# Altium PCB TAUV-PHOD-Board.PcbDoc
Units mil, origin at the board's own origin, x right, y up, seen from the top; angles counter-clockwise.
Board outline 3480 x 2460 mil, 2 copper layers (Top Layer, Bottom Layer); 102 components, 57 nets, 317 pads, 60 vias.
Unrouted connection lines stored in the file: 1.
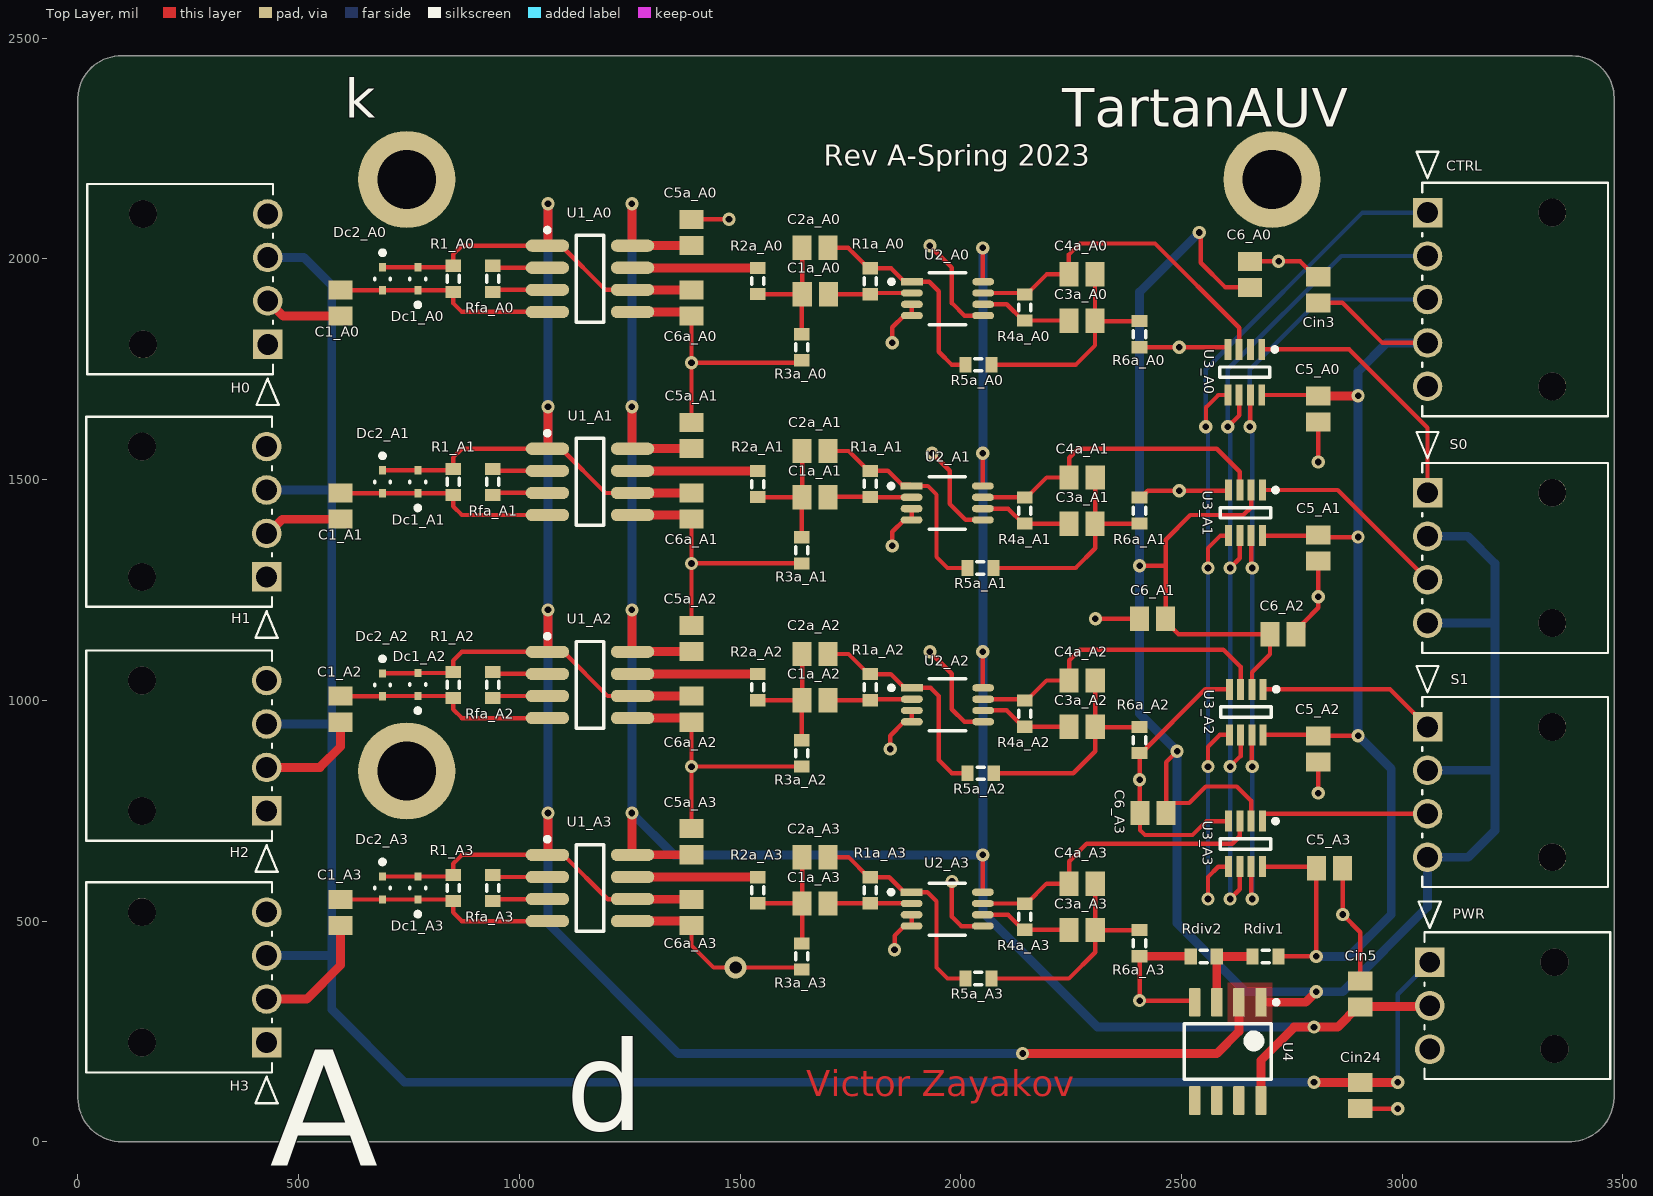
[diagram p0: Top Layer view]
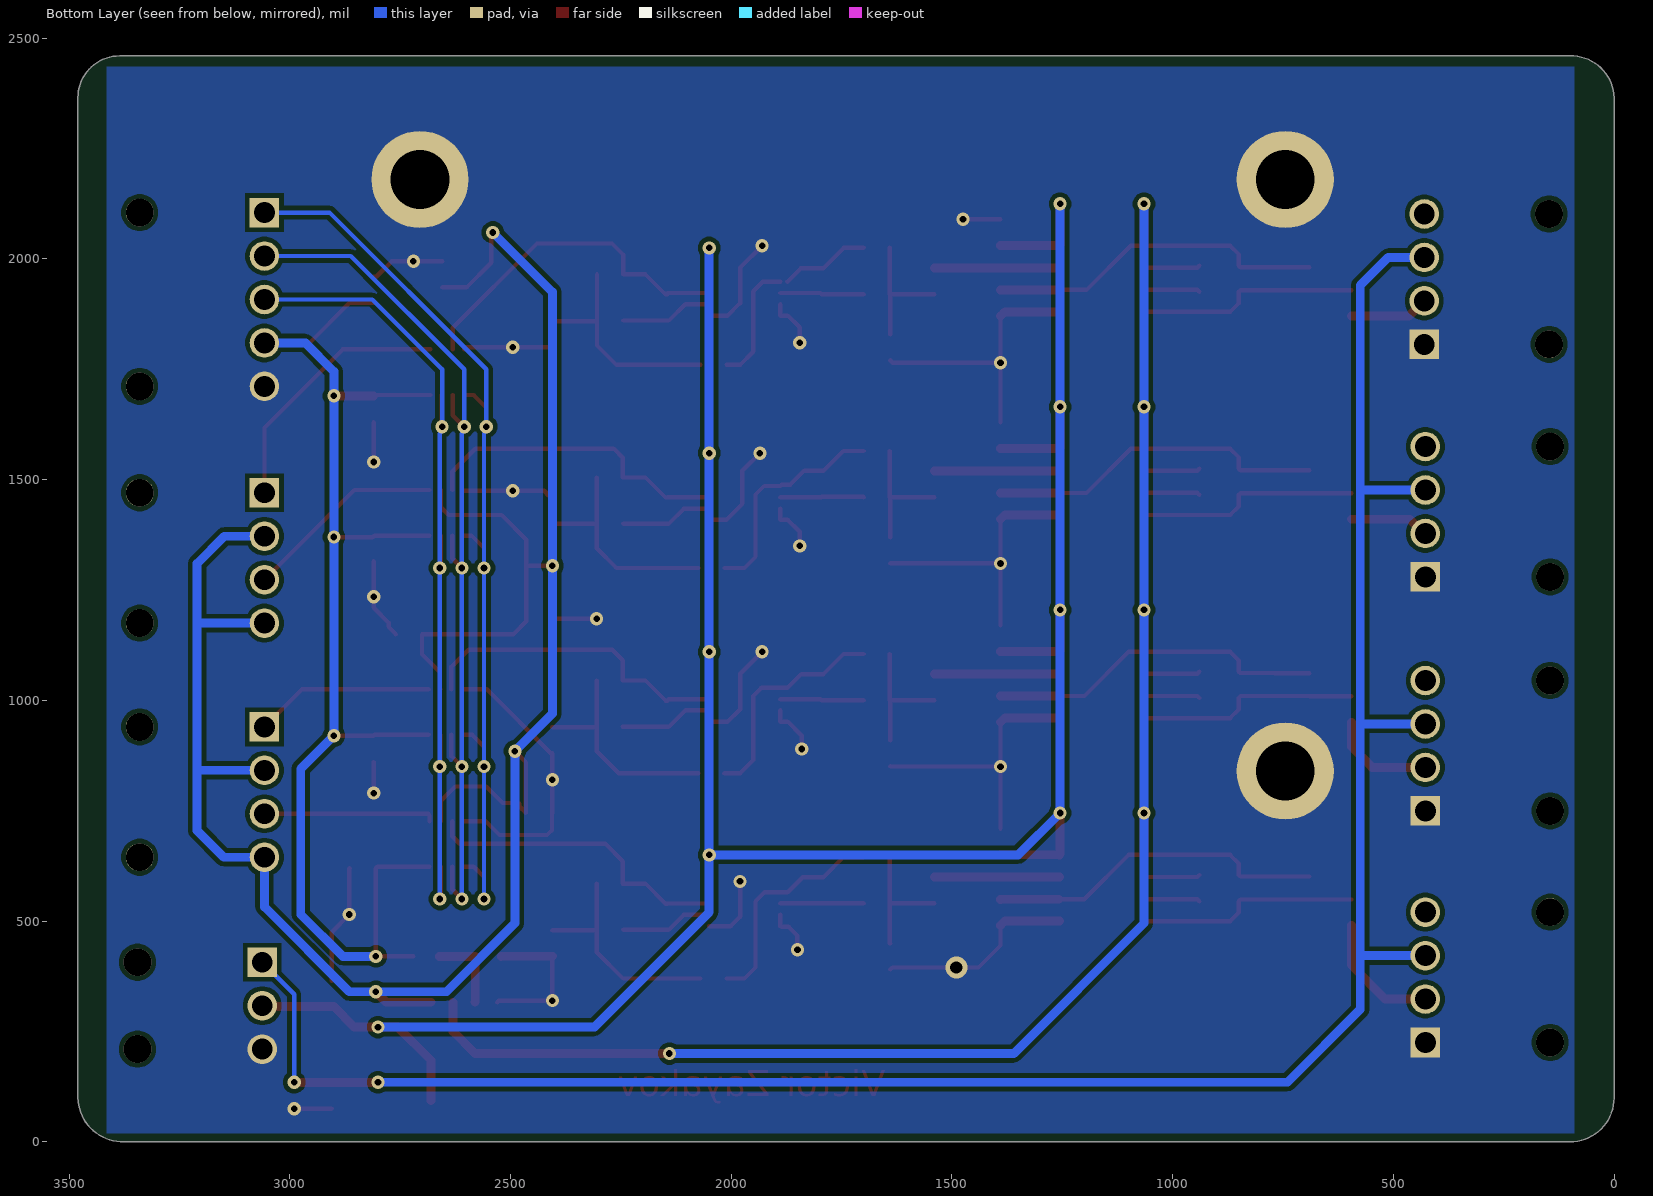
[diagram p1: Bottom Layer view, seen from below]

## Layer stack, top to bottom
Top Solder: solder mask 0.4, Solder Resist, Dk 3.5
Top Layer: signal copper 1.4
Dielectric 1: dielectric 12.6, FR-4, Dk 4.8
Bottom Layer: signal copper 1.4
Bottom Solder: solder mask 0.4, Solder Resist, Dk 3.5

## Board outline
100,0 cw(c100,100) 0,100 0,2365 cw(c97.5,2362.5) 100,2460 3385,2460 cw(c3385,2365) 3480,2365 3480,100 cw(c3377.5,102.5) 3375,0

## Design rules (kind name [scope] priority, off if disabled: settings)
Clearance [All] p1: gap=10 ignorepadtopadclearanceinfootprint=FALSE except(0: Arc-Hole Track-Hole SMDPad-Hole THPad-Hole Via-Hole Fill-Hole Poly-Hole Region-Hole Text-Hole; 7: Arc-Arc Arc-Track Arc-SMDPad Track-Track Track-SMDPad SMDPad-SMDPad)
PolygonConnect [All] p1: connectstyle=Direct reliefconductorwidth=10 reliefentries=4 polygonreliefangle="90 Angle" airgapwidth=10
RoutingVias [All] p1: holewidth=28 width=50 viastyle="Through Hole" minholewidth=28 minwidth=50 maxholewidth=28 maxwidth=50
SolderMaskExpansion [All] p1: expansion=4 istentingtop=FALSE
Width [All] p1: maxlimit=50 minlimit=6 preferedwidth=10
30 further rules are at their usual default settings.

## Classes and differential pairs
component class A3: C1_A3 C1a_A3 C2a_A3 C3a_A3 C4a_A3 C5_A3 C5a_A3 C6_A3 C6a_A3 Dc1_A3 Dc2_A3 R1_A3 R1a_A3 R2a_A3 R3a_A3 R4a_A3 R5a_A3 R6a_A3 Rfa_A3 U1_A3 U2_A3 U3_A3
component class A0: C1_A0 C1a_A0 C2a_A0 C3a_A0 C4a_A0 C5_A0 C5a_A0 C6_A0 C6a_A0 Dc1_A0 Dc2_A0 R1_A0 R1a_A0 R2a_A0 R3a_A0 R4a_A0 R5a_A0 R6a_A0 Rfa_A0 U1_A0 U2_A0 U3_A0
channel class Amplifiers: A0 A1 A2 A3
component class U_Power: Cin3 Cin5 Cin24 Rdiv1 Rdiv2 U4
component class Main: CTRL H0 H1 H2 H3 PWR S0 S1
component class A2: C1_A2 C1a_A2 C2a_A2 C3a_A2 C4a_A2 C5_A2 C5a_A2 C6_A2 C6a_A2 Dc1_A2 Dc2_A2 R1_A2 R1a_A2 R2a_A2 R3a_A2 R4a_A2 R5a_A2 R6a_A2 Rfa_A2 U1_A2 U2_A2 U3_A2
component class A1: C1_A1 C1a_A1 C2a_A1 C3a_A1 C4a_A1 C5_A1 C5a_A1 C6_A1 C6a_A1 Dc1_A1 Dc2_A1 R1_A1 R1a_A1 R2a_A1 R3a_A1 R4a_A1 R5a_A1 R6a_A1 Rfa_A1 U1_A1 U2_A1 U3_A1

## Components (designator, comment, footprint, x,y, rotation, side; value= is the part's Value field where it differs from the comment)
C1_A0 "Cap" C0805 595,1900 r90 top value=100nF (schematic designator C1)
C1_A1 "Cap" C0805 595,1440 r90 top value=100nF (schematic designator C1)
C1_A2 "Cap" C0805 595,980 r90 top value=100nF (schematic designator C1)
C1_A3 "Cap" C0805 595,519.53 r90 top value=100nF (schematic designator C1)
C1a_A0 "Cap" C0805 1670.47,1920 r0 top value=1nF (schematic designator C1a)
C1a_A1 "Cap" C0805 1670,1460 r0 top value=1nF (schematic designator C1a)
C1a_A2 "Cap" C0805 1670,1000 r0 top value=1nF (schematic designator C1a)
C1a_A3 "Cap" C0805 1670,540 r0 top value=1nF (schematic designator C1a)
C2a_A0 "Cap" C0805 1670,2025 r0 top value=1nF (schematic designator C2a)
C2a_A1 "Cap" C0805 1670,1565 r0 top value=1nF (schematic designator C2a)
C2a_A2 "Cap" C0805 1670,1105 r0 top value=1nF (schematic designator C2a)
C2a_A3 "Cap" C0805 1670,645 r0 top value=1nF (schematic designator C2a)
C3a_A0 "Cap" C0805 2274.53,1860 r180 top value=1nF (schematic designator C3a)
C3a_A1 "Cap" C0805 2274.53,1400 r180 top value=1nF (schematic designator C3a)
C3a_A2 "Cap" C0805 2275,940 r180 top value=1nF (schematic designator C3a)
C3a_A3 "Cap" C0805 2275,480 r180 top value=1nF (schematic designator C3a)
C4a_A0 "Cap" C0805 2274.53,1965 r180 top value=1nF (schematic designator C4a)
C4a_A1 "Cap" C0805 2275,1505 r180 top value=1nF (schematic designator C4a)
C4a_A2 "Cap" C0805 2275,1045 r180 top value=1nF (schematic designator C4a)
C4a_A3 "Cap" C0805 2275,585 r180 top value=1nF (schematic designator C4a)
C5_A0 "100nF" C0805 2810,1660 r90 top (schematic designator C5)
C5_A1 "100nF" C0805 2810,1345 r90 top (schematic designator C5)
C5_A2 "100nF" C0805 2810,890 r90 top (schematic designator C5)
C5_A3 "100nF" C0805 2835,620 r180 top (schematic designator C5)
C5a_A0 "Cap" C0805 1390,2060 r90 top value=100nF (schematic designator C5a)
C5a_A1 "Cap" C0805 1390,1600 r90 top value=100nF (schematic designator C5a)
C5a_A2 "Cap" C0805 1390,1140.47 r90 top value=100nF (schematic designator C5a)
C5a_A3 "Cap" C0805 1390,680 r90 top value=100nF (schematic designator C5a)
C6_A0 "100nF" C0805 2655,1965 r270 top (schematic designator C6)
C6_A1 "100nF" C0805 2434.53,1185 r0 top (schematic designator C6)
C6_A2 "100nF" C0805 2730,1150 r180 top (schematic designator C6)
C6_A3 "100nF" C0805 2435.47,745 r0 top (schematic designator C6)
C6a_A0 "Cap" C0805 1390,1900 r90 top value=100nF (schematic designator C6a)
C6a_A1 "Cap" C0805 1390,1440 r90 top value=100nF (schematic designator C6a)
C6a_A2 "Cap" C0805 1390,980 r90 top value=100nF (schematic designator C6a)
C6a_A3 "Cap" C0805 1390,519.53 r90 top value=100nF (schematic designator C6a)
Cin3 "1uF" C0805 2810,1930 r270 top
Cin5 "1uF" C0805 2905,335 r270 top
Cin24 "1uF" C0805 2905,105 r90 top
CTRL "1053131305" CON_1053131305 3057.32,2105 r90 top
Dc1_A0 "RB520S30T1G" FP-502-01-MFG 770,1955 r90 top (schematic designator Dc1)
Dc1_A1 "RB520S30T1G" FP-502-01-MFG 770,1495 r90 top (schematic designator Dc1)
Dc1_A2 "RB520S30T1G" FP-502-01-MFG 770,1035.98 r90 top (schematic designator Dc1)
Dc1_A3 "RB520S30T1G" FP-502-01-MFG 770,575 r90 top (schematic designator Dc1)
Dc2_A0 "RB520S30T1G" FP-502-01-MFG 690,1955 r270 top (schematic designator Dc2)
Dc2_A1 "RB520S30T1G" FP-502-01-MFG 690,1495 r270 top (schematic designator Dc2)
Dc2_A2 "RB520S30T1G" FP-502-01-MFG 690,1035 r270 top (schematic designator Dc2)
Dc2_A3 "RB520S30T1G" FP-502-01-MFG 690,575 r270 top (schematic designator Dc2)
H0 "1053131304" CON_1053131304 430,1806.57 r270 top
H1 "1053131304" CON_1053131304 427.68,1279.72 r270 top
H2 "1053131304" CON_1053131304 427.68,749.72 r270 top
H3 "1053131304" CON_1053131304 427.68,225 r270 top
PWR "1053131303" CON_1053131303 3062.32,406.85 r90 top
R1_A0 "1K" J1-0603 850,1955 r90 top (schematic designator R1)
R1_A1 "1K" J1-0603 850,1495 r90 top (schematic designator R1)
R1_A2 "1K" J1-0603 850,1035 r90 top (schematic designator R1)
R1_A3 "1K" J1-0603 850,575 r90 top (schematic designator R1)
R1a_A0 "+-1%" J1-0603 1795,1949.53 r90 top value=13k (schematic designator R1a)
R1a_A1 "+-1%" J1-0603 1795,1490.47 r90 top value=13k (schematic designator R1a)
R1a_A2 "+-1%" J1-0603 1795,1030 r90 top value=13k (schematic designator R1a)
R1a_A3 "+-1%" J1-0603 1795,570 r90 top value=13k (schematic designator R1a)
R2a_A0 "+-1%" J1-0603 1540,1950 r270 top value=4.12k (schematic designator R2a)
R2a_A1 "+-1%" J1-0603 1540,1490 r270 top value=4.12k (schematic designator R2a)
R2a_A2 "+-1%" J1-0603 1540,1030 r270 top value=4.12k (schematic designator R2a)
R2a_A3 "+-1%" J1-0603 1540,570 r270 top value=4.12k (schematic designator R2a)
R3a_A0 "+-1%" J1-0603 1640,1800 r270 top value=3.57k (schematic designator R3a)
R3a_A1 "+-1%" J1-0603 1640,1340 r270 top value=3.57k (schematic designator R3a)
R3a_A2 "+-1%" J1-0603 1640,880 r270 top value=3.57k (schematic designator R3a)
R3a_A3 "+-1%" J1-0603 1640,420 r270 top value=3.57k (schematic designator R3a)
R4a_A0 "+-1%" J1-0603 2145,1890 r90 top value=5.23k (schematic designator R4a)
R4a_A1 "+-1%" J1-0603 2145,1430 r90 top value=5.23k (schematic designator R4a)
R4a_A2 "+-1%" J1-0603 2145,970 r90 top value=5.23k (schematic designator R4a)
R4a_A3 "+-1%" J1-0603 2145,510 r90 top value=5.23k (schematic designator R4a)
R5a_A0 "+-1%" J1-0603 2040,1760 r0 top value=1.69k (schematic designator R5a)
R5a_A1 "+-1%" J1-0603 2044.53,1300 r0 top value=1.69k (schematic designator R5a)
R5a_A2 "+-1%" J1-0603 2045,835 r0 top value=1.69k (schematic designator R5a)
R5a_A3 "+-1%" J1-0603 2040,370 r0 top value=1.69k (schematic designator R5a)
R6a_A0 "+-1%" J1-0603 2405,1829.53 r270 top value=1.47k (schematic designator R6a)
R6a_A1 "+-1%" J1-0603 2405,1430 r90 top value=1.47k (schematic designator R6a)
R6a_A2 "+-1%" J1-0603 2405,910 r270 top value=1.47k (schematic designator R6a)
R6a_A3 "+-1%" J1-0603 2405,450 r270 top value=1.47k (schematic designator R6a)
Rdiv1 "100K" J1-0603 2690.47,420 r0 top
Rdiv2 "100K" J1-0603 2550.47,420 r0 top
Rfa_A0 "50 Ohm" J1-0603 940,1955 r90 top (schematic designator Rfa)
Rfa_A1 "50 Ohm" J1-0603 940,1495 r90 top (schematic designator Rfa)
Rfa_A2 "50 Ohm" J1-0603 940,1035 r90 top (schematic designator Rfa)
Rfa_A3 "50 Ohm" J1-0603 940,575 r90 top (schematic designator Rfa)
S0 "1053131304" CON_1053131304 3057.32,1470.27 r90 top
S1 "1053131304" CON_1053131304 3057.32,940 r90 top
U1_A0 "AD8221ARZ" ADI-R-8_M 1160,1955 r0 top (schematic designator U1)
U1_A1 "AD8221ARZ" ADI-R-8_M 1160,1495 r0 top (schematic designator U1)
U1_A2 "AD8221ARZ" ADI-R-8_M 1160,1035 r0 top (schematic designator U1)
U1_A3 "AD8221ARZ" ADI-R-8_M 1160,575 r0 top (schematic designator U1)
U2_A0 "OPA1678IDGKR" FP-DGK0008A-IPC_C 1970,1910 r0 top (schematic designator U2)
U2_A1 "OPA1678IDGKR" FP-DGK0008A-IPC_C 1969.26,1447.2 r0 top (schematic designator U2)
U2_A2 "OPA1678IDGKR" FP-DGK0008A-IPC_C 1970,990 r0 top (schematic designator U2)
U2_A3 "OPA1678IDGKR" FP-DGK0008A-IPC_C 1969.26,527.2 r0 top (schematic designator U2)
U3_A0 "LTC6910-3CTS8#TRMPBF" LT-TS8-8-TSOT-23_V 2643.39,1743.43 r270 top (schematic designator U3)
U3_A1 "LTC6910-3CTS8#TRMPBF" LT-TS8-8-TSOT-23_V 2645,1425 r270 top (schematic designator U3)
U3_A2 "LTC6910-3CTS8#TRMPBF" LT-TS8-8-TSOT-23_V 2646.61,973.43 r270 top (schematic designator U3)
U3_A3 "LTC6910-3CTS8#TRMPBF" LT-TS8-8-TSOT-23_V 2645,675 r270 top (schematic designator U3)
U4 "TL072CDR" D0008A_M 2605,205 r270 top

## Footprints (in the part's own frame and the unit in brackets; to place one, negate y for a bottom-side part, rotate by r counter-clockwise, add the part's x,y. Pads: shape width x height; smd on the part's side, far side on the other; paste and mask are expansions set on the pad)
ADI-R-8_M [mm] "SOIC, 8-Leads, Body 4.9x3.9mm, Pitch 1.27mm, IPC Low Density"
  oval 2.5x0.7 smd: 1(-2.45,1.905) 2(-2.45,0.635) 3(-2.45,-0.635) 4(-2.45,-1.905) 5(2.45,-1.905) 6(2.45,-0.635) 7(2.45,0.635) 8(2.45,1.905)
  silkscreen extent -2.57,-2.5 0.8,2.93, body extent -2,-2.5 2,2.5, height 1.75
C0805 [mm] "Chip Capacitor, Body 2.0x1.3mm, IPC High Density"
  rect 1.1x1.4 smd: 1(-0.75,0) 2(0.75,0)
  body extent -1.1,-0.72 1.1,0.72, height 1.4
CON_1053131303 [mm]
  rect 1.7x1.7 hole 1.2 mask+0.076: 1(0,0)
  round 1.7 hole 1.2 mask+0.076: 2(-2.5,0) 3(-5,0)
  round 1.6 hole 1.6 unplated mask+0.076: 4(0,-7.18) 5(-5,-7.18)
  silkscreen extent -6.72,-10.38 3.5,0.64, body extent 0,0 0.25,0.25, height 0.25
CON_1053131304 [mm]
  rect 1.7x1.7 hole 1.2 mask+0.076: 1(0,0)
  round 1.7 hole 1.2 mask+0.076: 2(-2.5,0) 3(-5,0) 4(-7.5,0)
  round 1.6 hole 1.6 unplated mask+0.076: 5(0,-7.18) 6(-7.5,-7.18)
  silkscreen extent -9.22,-10.38 3.5,0.64, body extent 0,0 0.25,0.25, height 0.25
CON_1053131305 [mm]
  rect 1.7x1.7 hole 1.2 mask+0.076: 1(0,0)
  round 1.7 hole 1.2 mask+0.076: 2(-2.5,0) 3(-5,0) 4(-7.5,0) 5(-10,0)
  round 1.6 hole 1.6 unplated mask+0.076: 6(0,-7.18) 7(-10,-7.18)
  silkscreen extent -11.72,-10.38 3.5,0.64, body extent 0,0 0.25,0.25, height 0.25
D0008A_M [mm] "SOIC, 8-Leads, Body 5x4mm, Pitch 1.27mm, IPC Low Density"
  rrect15% 1.65x0.65 smd: 1(-2.825,1.905) 2(-2.825,0.635) 3(-2.825,-0.635) 4(-2.825,-1.905) 5(2.825,-1.905) 6(2.825,-0.635) 7(2.825,0.635) 8(2.825,1.905)
  silkscreen extent -2.95,-2.5 1.6,2.91, body extent -3,-2.45 3,2.45, height 1.63
FP-502-01-MFG [mm]
  rect 0.48x0.4 smd paste+0 mask+0: 1(-0.66,0) 2(0.66,0)
  silkscreen extent -1.62,-0.45 0.05,0.45, body extent -1,-0.55 1,0.55, height 0.25
FP-DGK0008A-IPC_C [mm]
  rect 1.257x0.418 smd paste+0 mask+0: 1(-2.051,0.975)
  rrect100% 1.257x0.418 smd paste+0 mask+0: 2(-2.051,0.325) 3(-2.051,-0.325) 4(-2.051,-0.975) 5(2.051,-0.975) 6(2.051,-0.325) 7(2.051,0.325) 8(2.051,0.975)
  silkscreen extent -3.35,-1.5 1.05,1.5, body extent -2.78,-1.6 2.78,1.6, height 0.25
J1-0603 [mm] "Chip Resistor, Body 1.6x0.8mm, IPC High Density"
  rect 0.7x0.9 smd: 1(-0.75,0) 2(0.75,0)
  silkscreen extent -0.2,-0.35 0.2,0.35, body extent -0.85,-0.48 0.85,0.48, height 0.9
LT-TS8-8-TSOT-23_V [mm] "SOT23, 8-Leads, Body 2.90x1.63mm, Pitch 0.65mm, IPC High Density, Recommended"
  rect 1.22x0.4 smd: 1(-1.31,0.975) 2(-1.31,0.325) 3(-1.31,-0.325) 4(-1.31,-0.975) 5(1.31,-0.975) 6(1.31,-0.325) 7(1.31,0.325) 8(1.31,0.975)
  silkscreen extent -1.43,-1.45 0.3,1.85, body extent -0.87,-1.45 0.88,1.45, height 1

## Part data
C1_A0 C1_A1 C1_A2 C1_A3 C1a_A0 C1a_A1 C1a_A2 C1a_A3 C2a_A0 C2a_A1 C2a_A2 C2a_A3 C3a_A0 C3a_A1 C3a_A2 C3a_A3 C4a_A0 C4a_A1 C4a_A2 C4a_A3 C5a_A0 C5a_A1 C5a_A2 C5a_A3 C6a_A0 C6a_A1 C6a_A2 C6a_A3: "Capacitor", LatestRevisionDate=17-Jul-2002, LatestRevisionNote="Re-released for DXP Platform.", PackageDescription="Radial Cap, Thru-Hole; 2 Leads; 0.3 in Pin Spacing", PackageReference=RAD-0.3, Published=8-Jun-2000, Publisher="Altium Limited"
C5_A0 C5_A1 C5_A2 C5_A3 C6_A0 C6_A1 C6_A2 C6_A3 Cin3 Cin5 Cin24: library part Cap, "Capacitor", LatestRevisionDate=17-Jul-2002, LatestRevisionNote="Re-released for DXP Platform.", PackageDescription="Radial Cap, Thru-Hole; 2 Leads; 0.3 in Pin Spacing", PackageReference=RAD-0.3, Published=8-Jun-2000, Publisher="Altium Limited"
CTRL H0 H1 H2 H3 PWR S0 S1: "No Description Available", Mfr_Name="Molex Connector Corporation", Copyright="Copyright (C) 2023 Ultra Librarian. All rights reserved.", RefDes=RefDes, Type=DEV
  CTRL: Manufacturer_Part_Number=1053131305
  H0 H1 H2 H3 S0 S1: Manufacturer_Part_Number=1053131304
  PWR: Manufacturer_Part_Number=1053131303
Dc1_A0 Dc1_A1 Dc1_A2 Dc1_A3 Dc2_A0 Dc2_A1 Dc2_A2 Dc2_A3: library part CMP-1055-00482-2, "DIODE SCHOTTKY 30V 200MA SOD523", Average Rectified Current=200mA, Case/Package=SOD-523-2, Forward Voltage=600mV, Max Operating Temperature=150°C, Max Repetitive Reverse Voltage (Vrrm)=30V, Max Reverse Leakage Current=1uA, Min Operating Temperature=-55°C, Package Quantity=1, Power Dissipation=200mW, Contact Plating=Tin, Current Rating=200mA, Element Configuration=Single, Forward Current=200mA, Height=0.7mm, Lead Free="Lead Free", Length=1.3mm, Max Forward Surge Current (Ifsm)=200mA, Max Reverse Voltage (DC)=30V, Number of Pins=2, Output Current=200mA, Packaging="Tape and Reel", Peak Reverse Current=1uA, Polarity=Standard, Radiation Hardening=No, REACH SVHC="No SVHC", Voltage Rating (DC)=30V, Width=0.9mm
R1_A0 R1_A1 R1_A2 R1_A3 R1a_A0 R1a_A1 R1a_A2 R1a_A3 R2a_A0 R2a_A1 R2a_A2 R2a_A3 R3a_A0 R3a_A1 R3a_A2 R3a_A3 R4a_A0 R4a_A1 R4a_A2 R4a_A3 R5a_A0 R5a_A1 R5a_A2 R5a_A3 R6a_A0 R6a_A1 R6a_A2 R6a_A3 Rdiv1 Rdiv2 Rfa_A0 Rfa_A1 Rfa_A2 Rfa_A3: library part Res3, "Resistor", LatestRevisionDate=29-May-2009, LatestRevisionNote="IPC-7351 Footprint Added.", PackageDescription="Chip Resistor", PackageReference=J1-0603, Published=8-Jun-2000, Publisher="Altium Limited"
U1_A0 U1_A1 U1_A2 U1_A3: library part CMP-0934-00045-1, "Precision Instrumentation Amplifier, 2 V/us, -40 to 125 degC, 8-Pin SOIC (R-8), RoHS, Tube", Manufacturer="Analog Devices", Quiescent Current="0.9 mA Typ.", Temperature Range="-40 to 125 degC", -3dB Bandwidth@G="1=825 kHz", ComponentLink1Description="Manufacturer URL", ComponentLink1URL=http://www.analog.com/en/index.html, ComponentLink2Description=Datasheet, ComponentLink2URL=http://www.analog.com/static/imported-files/data_sheets/AD8221.pdf, ComponentLink3Description="Package Specification", ComponentLink3URL=http://www.analog.com/static/imported-files/packages/PKG_PDF/SOIC_Narrow%20(R)/R_8.pdf, DatasheetVersion="Rev. C", Mounting Technology="Surface Mount", PackageDescription="8-Pin Standard Small Outline Package, Body 4.9 x 3.9 mm, Pitch 1.27 mm", PackageVersion=Jun-06, Packing=Tube, PartNumber=AD8221ARZ, RoHS=TRUE, Slew Rate@G="1=2 V/us Typ.", VIO="60 uV Max."
U2_A0 U2_A1 U2_A2 U2_A3: library part CMP-04894-000014-1, "IC AUDIO 2 CIRCUIT 8VSSOP", Case/Package=VSSOP, Input Bias Current=10pA, Input Offset Voltage (Vos)=500uV, Max Operating Temperature=85°C, Min Operating Temperature=-40°C, Operating Supply Current=2mA, Gain Bandwidth Product=16MHz, Mount="Surface Mount", Number of Channels=2, Number Of Circuits=2, Packaging="Cut Tape", RoHS Compliant=Yes, Slew Rate=9V/µs
U3_A0 U3_A1 U3_A2 U3_A3: library part CMP-0359-03724-2, "Single Channel, Digitally Controlled Programmable Gain Amplifier, 11 MHz Typical GBW, 16 V/us Typical SR, 2.7 to 11 V, 8-Pin SOT23 (TS8-8), Commercial, Pb-Free, Mini Reel", Linear Technology Part Number=LTC6910-3, Manufacturer="Linear Technology", Channels (#)=1, Code_JEDEC=MO-193, ComponentLink1Description="Manufacturer URL", ComponentLink1URL=http://www.linear.com/, ComponentLink2Description=Datasheet, ComponentLink2URL=http://cds.linear.com/docs/en/datasheet/6910123fa.pdf, ComponentLink3Description="Package Specification", ComponentLink3URL=http://cds.linear.com/docs/en/packaging/SOT_8_05-08-1637.pdf, DatasheetVersion="Rev. A", GBW (MHz) Typical=11, Is (mA) Typical=2, Mounting Technology="Surface Mount", PackageDescription="8-Lead Plastic TSOT-23, Body 2.9 x 1.63 mm, Pitch 0.65 mm", PackageReference=LT-TS8-8-TSOT-23, PackageVersion="Rev A", Packing="Mini Reel", PartNumber=LTC6910-3CTS8#TRMPBF, RevisionNote="URLs updated", RoHS=Pb-Free, SR (V/us) Typical=16, Type=PGA, Vos (mV) Typical=3, Vs Max (V)=11, Vs Min (V)=2.7
U4: library part CMP-0017-00628-2, "Dual Low-Noise JFET-Input General-Purpose Operational Amplifier, 7 to 36 V, 0 to 70 degC, 8-pin SOIC (D8), Green (RoHS & no Sb/Br)", Manufacturer="Texas Instruments", Rating=Catalog, Total Supply Voltage(Max)(+5V is 5, +/-5V is 10)=36, Total Supply Voltage(Min)(+5V is 5, +/-5V is 10)=7, CMRR(Min)(dB)=70, Code_JEDEC=MS-012, ComponentLink1Description="Manufacturer URL", ComponentLink1URL=http://www.ti.com/, ComponentLink2Description=Datasheet, ComponentLink2URL=http://www.ti.com/lit/ds/symlink/tl072.pdf, ComponentLink3Description="Package Specification", ComponentLink3URL=http://www.ti.com/litv/pdf/msoi002j, DatasheetVersion=SLOS080J, Eco-Plan="Green (RoHS & no Sb/Br)", GBW(Typ)(MHz)=3, IIB(Max)(pA)=200, Iq per channel(Max)(mA)=2.5, Mounting Technology="Surface Mount", Number of Channels=2, Offset Drift(Typ)(uV/C)=18, PackageDescription="8-Pin Plastic Small Outline, Body 4.9 x 3.9 mm, Pitch 1.27 mm", PackageReference=D0008A, PackageVersion="4040047-3/M, 06/2011", PartNumber=TL072CDR, Slew Rate(Typ)(V/us)=13, Sub Family="General Purpose Amplifier, High Supply Voltage Amplifier (>=30V)", Vio (25C)(Max)(mV)=10, Vn at 1kHz(Typ)(nV/rtHz)=18

## Free pads (board coordinates)
  round 220 hole 133: M3(745,840) M3(745,2180) M3(2705,2180)

## Via types
v1: diameter 30, hole 15, Top Layer to Bottom Layer, 59 vias
v2: diameter 50, hole 28, Top Layer to Bottom Layer, 1 vias

## Nets (pads, with @x,y where several pads share a name; then routed paths per layer and width w, separated by ;. In a path a pad name is that pad's centre, name@x,y a point inside that pad or via, vN(x,y) a via of type N, cw(c..) or ccw(c..) an arc to the next point about the centre after c; other vN are vias at no path point)
3V3: C5_A0.2 C5_A1.2 C5_A2.2 C5_A3.2 Cin3.2 CTRL.4 Rdiv1.2 U3_A0.8 U3_A1.8 U3_A2.8 U3_A3.8 | length 3004.4
  Top Layer w10: U3_A0.8 2807.68,1691.85 C5_A0.2 ; U3_A3.8 2802.05,623.43 C5_A3.2 2805,619.53 v1(2805,420) Rdiv1.2 ; U3_A1.8 2808.9,1373.43 2812.32,1370 v1(2900,1370) ; U3_A2.8 2807.68,921.85 2809.53,920 v1(2900,920) ; Cin3.2 2864.53,1900.47 2955.28,1809.72 CTRL.4
  Top Layer w20: C5_A0.2 2810.24,1689.76 2899.76,1689.76 v1(2900,1690) v1@2901.91,1691.91 ; v1@2899.76,919.76 v1(2900,920)
  Bottom Layer w20: v1(2805,420) 2880,420 2975,515 2975,845 v1(2900,920) v1(2900,1370) v1(2900,1690) 2900,1745 2964.72,1809.72 CTRL.4
3V3/2: C6_A0.2 C6_A1.2 C6_A2.2 C6_A3.2 C6a_A0.2 C6a_A1.2 C6a_A2.2 C6a_A3.2 Dc1_A0.2 Dc1_A1.2 Dc1_A2.2 Dc1_A3.2 Dc2_A0.1 Dc2_A1.1 Dc2_A2.1 Dc2_A3.1 R1_A0.2 R1_A1.2 R1_A2.2 R1_A3.2 S0.2 S0.4 S1.2 S1.4 U1_A0.1 U1_A0.6 U1_A1.1 U1_A1.6 U1_A2.1 U1_A2.6 U1_A3.1 U1_A3.6 U3_A0.2 U3_A1.2 U3_A2.2 U3_A3.2 U4.1 U4.2 | length 12303.5
  Top Layer w10: Dc2_A3.1 Dc1_A3.2 846.46,600.98 R1_A3.2 850,630 870,650 U1_A3.1 1100,650 1200.16,549.84 1256.62,549.84 U1_A3.6@1256.93,549.53 ; Dc2_A2.1 690.49,1061.48 769.51,1061.48 Dc1_A2.2 847.44,1061.97 R1_A2.2 850,1090 870,1110 U1_A2.1 1100,1110 1200,1010 U1_A2.6 ; Dc2_A1.1 Dc1_A1.2 846.46,1520.98 R1_A1.2 850,1550 870,1570 U1_A1.1 1095,1570 1195.24,1469.76 U1_A1.6@1256.69,1469.76 ; Dc2_A0.1 Dc1_A0.2 R1_A0.2@846.46,1980.98 ; R1_A0.2 850,2010 870,2030 U1_A0.1 1095,2030 1195.24,1929.76 U1_A0.6@1256.69,1929.76 ; v1(2405,1305) 2464.06,1305 ; v1(2490,885) 2465,860 C6_A3.2 2480,760 2480,765.91 2481.65,767.56 2517.56,767.56 2555,805 2625,805 2657.8,772.2 U3_A3.2 ; v1(2540,2060) 2543.83,2056.17 2543.83,1991.17 2599.53,1935.47 C6_A0.2 ; U3_A1.2 2657.8,1437.8 2640,1420 2520,1420 2464.06,1364.06 2464.06,1305 ; U3_A2.2 2659.67,1025.26 2659.67,1064.02 2700.47,1104.82 C6_A2.2 2493.15,1150 2464.06,1179.09 C6_A1.2 2464.06,1305
  Top Layer w20: U1_A3.1 1065,651.46 v1(1065,745) ; U1_A2.1 1065,1111.46 v1(1065,1205) ; U1_A1.1 1065,1571.46 v1(1065,1665) ; U1_A0.1 1065,2031.46 v1(1065,2125) ; U1_A2.6 1256.69,1009.76 1389.76,1009.76 C6a_A2.2 ; U1_A1.6@1256.69,1469.76 1389.76,1469.76 C6a_A1.2 ; U1_A0.6@1256.69,1929.76 1389.76,1929.76 C6a_A0.2 ; U1_A3.6@1256.93,549.53 1389.53,549.53 C6a_A3.2 ; v1(2140,200) 2580,200 2630,250 U4.2 ; U4.1 2781.22,316.22 v1(2805,340)
  Bottom Layer w20: v1(1065,2125) v1(1065,1665) v1(1065,1205) v1(1065,745) 1065,495 1360,200 v1(2140,200) ; v1(2540,2060) 2405,1925 2405,970 v1(2490,885) 2490,495 2645,340 v1(2805,340) 2865,340 3057.32,532.32 S1.4 3149.72,644.72 3210,705 3210,840 ; S1.2 3208.43,841.57 3210,840 ; S0.4 3210,1175 ; S0.2 3148.15,1371.85 3210,1310 3210,1175 ; 3210,840 3210,1175
+5: C5a_A0.1 C5a_A1.1 C5a_A2.1 C5a_A3.1 Cin5.2 PWR.2 U1_A0.8 U1_A1.8 U1_A2.8 U1_A3.8 U2_A0.8 U2_A1.8 U2_A2.8 U2_A3.8 U4.8 | length 6336.5
  Top Layer w10: U2_A3.8 v1(2050,650) ; v1(2050,1110) 2050,1029.13 U2_A2.8 ; U2_A1.8 v1(2050,1560) ; v1(2050,2025) 2050,1949.13 U2_A0.8
  Top Layer w20: v1(1255,745) 1255,651.46 U1_A3.8 1256.69,650.24 1389.76,650.24 C5a_A3.1 ; v1(1255,1205) 1255,1111.46 U1_A2.8 1256.93,1110.47 1389.53,1110.47 C5a_A2.1 ; v1(1255,1665) 1255,1571.46 U1_A1.8 1256.69,1570.24 1389.76,1570.24 C5a_A1.1 ; v1(1255,2125) 1255,2031.93 1256.69,2030.24 1389.76,2030.24 C5a_A0.1 ; U4.8 2680,185 2755,260 v1(2800,260) 2853.62,260 2900.57,306.95 3060.85,306.95 PWR.2
  Bottom Layer w20: v1(1255,2125) v1(1255,1665) v1(1255,1205) v1(1255,745) 1350,650 v1(2050,650) ; v1(2050,2025) v1(2050,1560) v1(2050,1110) v1(2050,650) ; v1(2800,260) 2310,260 2050,520 v1(2050,650)
+24: Cin24.2 H0.3 H1.3 H2.3 H3.3 PWR.1 | length 5040.9
  Top Layer w20: v1(2800,135) 2800.24,134.76 2904.76,134.76 Cin24.2 2905.24,134.76 2989.76,134.76 v1(2990,135)
  Bottom Layer w10: v1(2990,135) 2990,334.53 PWR.1
  Bottom Layer w20: H3.3 573.15,421.85 575,420 ; H2.3 573.42,946.58 575,945 ; H1.3 573.42,1476.58 575,1475 ; H0.3 511.57,2003.43 575,1940 575,1475 ; v1(2800,135) 740,135 575,300 575,420 ; 575,420 575,945 ; 575,945 575,1475
FILT_IN_A0: R2a_A0.1 U1_A0.7 | length 283.1
  Top Layer w20: U1_A0.7@1256.93,1979.53 R2a_A0.1
FILT_IN_A1: R2a_A1.1 U1_A1.7 | length 283.1
  Top Layer w20: U1_A1.7@1256.93,1519.53 R2a_A1.1
FILT_IN_A2: R2a_A2.1 U1_A2.7 | length 283.7
  Top Layer w20: U1_A2.7 1256.69,1059.76 1539.76,1059.76 R2a_A2.1
FILT_IN_A3: R2a_A3.1 U1_A3.7 | length 283.7
  Top Layer w20: U1_A3.7 1256.69,599.76 1539.76,599.76 R2a_A3.1
FILT_OUT_A0: C4a_A0.2 R4a_A0.2 U2_A0.7 U3_A0.3 | length 782.4
  Top Layer w10: U2_A0.7 R4a_A0.2@2145,1922.8 ; R4a_A0.2 2148.94,1919.53 2194.41,1965 C4a_A0.2 2245,2010 2270,2035 2440,2035 2630.59,1844.41 U3_A0.3
FILT_OUT_A1: C4a_A1.2 R4a_A1.2 U2_A1.7 U3_A1.3 | length 716.6
  Top Layer w10: U2_A1.7 R4a_A1.2@2144.53,1460 ; R4a_A1.2 2148.94,1459.53 2194.41,1505 C4a_A1.2 2245.47,1549.77 2265.7,1570 2580,1570 2632.2,1517.8 U3_A1.3
FILT_OUT_A2: C4a_A2.2 R4a_A2.2 U2_A2.7 U3_A2.3 | length 726.5
  Top Layer w10: U2_A2.7 2141.73,1002.8 R4a_A2.2 2148.94,999.53 2194.41,1045 C4a_A2.2 2245.47,1091.11 2269.37,1115 2595,1115 2633.82,1076.18 U3_A2.3
FILT_OUT_A3: C4a_A3.2 R4a_A3.2 U2_A3.7 U3_A3.3 | length 708.9
  Top Layer w10: U2_A3.7 R4a_A3.2@2144.53,540 ; R4a_A3.2 2148.94,539.53 2194.41,585 C4a_A3.2 2245.47,635.47 2285,675 2615,675 2632.2,692.2 U3_A3.3
GND: C5_A0.1 C5_A1.1 C5_A2.1 C5_A3.1 C5a_A0.2 C5a_A1.2 C5a_A2.2 C5a_A3.2 C6_A0.1 C6_A1.1 C6_A2.1 C6_A3.1 C6a_A0.1 C6a_A1.1 C6a_A2.1 C6a_A3.1 Cin3.1 Cin5.1 Cin24.1 CTRL.5 H0.1 H1.1 H2.1 H3.1 pad.M3 PWR.3 R3a_A0.2 R3a_A1.2 R3a_A2.2 R3a_A3.2 R6a_A0.2 R6a_A1.2 R6a_A2.2 R6a_A3.2 Rdiv2.1 U1_A0.5 U1_A1.5 U1_A2.5 U1_A3.5 U2_A0.3 U2_A0.4 U2_A0.5 U2_A1.3 U2_A1.4 U2_A1.5 U2_A2.3 U2_A2.4 U2_A2.5 U2_A3.3 U2_A3.4 U2_A3.5 U3_A0.4 U3_A1.4 U3_A2.4 U3_A3.4 U4.4 | length 6111.9
  Top Layer w10: C6a_A3.1 1390,445 1440,395 1635.47,395 R3a_A3.2 ; C5a_A3.2 v1(1390,850) ; C6a_A2.1 v1(1390,850) ; C5a_A2.2 v1(1390,1310) ; C6a_A1.1 v1(1390,1310) ; C5a_A1.2 v1(1390,1765) ; C6a_A0.1 v1(1390,1765) ; C5a_A0.2 1390.47,2090 v1(1475,2090) ; R3a_A2.2 1639.76,850.24 1390.24,850.24 v1(1390,850) ; R3a_A1.2 1639.76,1310.24 1390.24,1310.24 v1(1390,1310) ; R3a_A0.2 1634.53,1765 v1(1390,1765) ; v1(1840,890) 1840,920 1871.61,951.61 U2_A2.4 U2_A2.3 ; v1(1845,1350) 1845,1381.81 1872.01,1408.82 U2_A1.4 U2_A1.3 ; v1(1845,1810) 1845,1845 1871.61,1871.61 U2_A0.4 U2_A0.3 ; v1(1850,435) 1850,467.14 1869.74,486.87 1886.57,486.87 U2_A3.4 U2_A3.3 ; v1(1930,1110) 1979.84,1060.16 1979.84,980.16 2008.39,951.61 U2_A2.5 ; v1(1930,2030) 1980,1980 1980,1900 2008.39,1871.61 U2_A0.5 ; v1(1935,1560) 1975,1520 1975,1445 2011.18,1408.82 U2_A1.5 ; v1(1980,590) 1980,510 2001.18,488.82 U2_A3.5 ; v1(2305,1185) C6_A1.1 ; R6a_A3.2 v1(2405,320) 2526.22,320 U4.4 ; C6_A3.1@2405,745 v1(2405,820) R6a_A2.2 2408.94,880.47 2553.46,1025 U3_A2.4 ; R6a_A1.2 2408.94,1459.53 2417.72,1468.31 2417.72,1469.14 2423.57,1475 v1(2495,1475) 2605.04,1475 U3_A1.4 ; R6a_A0.2 v1(2495,1800) 2602.13,1800 2605,1797.13 U3_A0.4 ; C6_A3.1 2405.94,706.29 2417.23,695 2525,695 2556.57,726.57 U3_A3.4 ; C6_A0.1 2655.47,1995 v1(2720,1995) 2768.62,1995 2804.09,1959.53 Cin3.1 ; C6_A2.1 2776.18,1166.65 2776.18,1176.18 2810,1210 C5_A1.1 ; v1(2810,790) C5_A2.1 ; v1(2810,1540) C5_A0.1 ; C5_A3.1 2865,619.53 v1(2865,515) 2905,475 Cin5.1 ; Cin24.1 2905.47,75 v1(2990,75)
  Top Layer w20: U1_A3.5 1380,500 C6a_A3.1 ; U1_A2.5 1380.47,960 C6a_A2.1 ; U1_A1.5 1380.47,1420 C6a_A1.1 ; U1_A0.5 1380.47,1880 C6a_A0.1 ; R6a_A3.2 2405.24,420.24 2520.71,420.24 Rdiv2.1
  other v1: 2810,1235
  other v2: 1490,395
NetC1_A0_1: C1_A0.1 H0.2 | length 179.3
  Top Layer w20: H0.2 430.65,1905 465.18,1870.47 C1_A0.1
NetC1_A0_2: C1_A0.2 Dc1_A0.1 Dc2_A0.2 R1_A0.1 U1_A0.4 | length 499
  Top Layer w10: C1_A0.2 595.51,1929.02 Dc2_A0.2 Dc1_A0.1 R1_A0.1@846.46,1929.02 ; R1_A0.1 850,1900 870,1880 U1_A0.4
NetC1_A1_1: C1_A1.1 H1.2 | length 180.7
  Top Layer w20: H1.2 430.54,1378.15 462.86,1410.47 C1_A1.1
NetC1_A1_2: C1_A1.2 Dc1_A1.1 Dc2_A1.2 R1_A1.1 U1_A1.4 | length 504
  Top Layer w10: C1_A1.2 595.51,1469.02 Dc2_A1.2 Dc1_A1.1 846.46,1469.02 R1_A1.1 850,1440 870,1420 U1_A1.4
NetC1_A2_1: C1_A2.1 H2.2 | length 242.2
  Top Layer w20: H2.2 548.15,848.15 595,895 C1_A2.1
NetC1_A2_2: C1_A2.2 Dc1_A2.1 Dc2_A2.2 R1_A2.1 U1_A2.4 | length 504.1
  Top Layer w10: C1_A2.2@595.51,1009.02 Dc2_A2.2 690.98,1010 Dc1_A2.1 845.47,1010 R1_A2.1 850,980 870,960 U1_A2.4
NetC1_A3_1: C1_A3.1 H3.2 | length 289
  Top Layer w20: H3.2 518.43,323.43 595,400 C1_A3.1
NetC1_A3_2: C1_A3.2 Dc1_A3.1 Dc2_A3.2 R1_A3.1 U1_A3.4 | length 503.8
  Top Layer w10: C1_A3.2 595.04,549.02 Dc2_A3.2 Dc1_A3.1 846.46,549.02 R1_A3.1 850,520 870,500 U1_A3.4
NetC1a_A0_1: C1a_A0.1 C2a_A0.1 R2a_A0.2 R3a_A0.1 | length 296.5
  Top Layer w10: R2a_A0.2 C1a_A0.1@1640.47,1920.47 ; R3a_A0.1 1640,1919.06 C1a_A0.1 C1a_A0.1@1640.47,1920.47 ; C2a_A0.1 C1a_A0.1@1640.47,1920.47
NetC1a_A0_2: C1a_A0.2 R1a_A0.1 U2_A0.2 | length 190.4
  Top Layer w10: C1a_A0.2 R1a_A0.1 1797.8,1922.8 U2_A0.2
NetC1a_A1_1: C1a_A1.1 C2a_A1.1 R2a_A1.2 R3a_A1.1 | length 295.5
  Top Layer w10: R2a_A1.2 1640,1460.47 R3a_A1.1 ; C1a_A1.1@1640.47,1460.47 C2a_A1.1
NetC1a_A1_2: C1a_A1.2 R1a_A1.1 U2_A1.2 | length 189.8
  Top Layer w10: C1a_A1.2 1700.47,1460.94 R1a_A1.1 1795.94,1460 U2_A1.2
NetC1a_A2_1: C1a_A2.1 C2a_A2.1 R2a_A2.2 R3a_A2.1 | length 295.5
  Top Layer w10: R2a_A2.2 1640,1000.47 R3a_A2.1 ; C1a_A2.1@1640.47,1000.47 C2a_A2.1
NetC1a_A2_2: C1a_A2.2 R1a_A2.1 U2_A2.2 | length 190.9
  Top Layer w10: C1a_A2.2 1700,1000.47 R1a_A2.1 1797.32,1002.8 U2_A2.2
NetC1a_A3_1: C1a_A3.1 C2a_A3.1 R2a_A3.2 R3a_A3.1 | length 296.3
  Top Layer w10: R2a_A3.2 1640,540.47 C1a_A3.1 ; R3a_A3.1 1640.47,450 C1a_A3.1 ; C2a_A3.1 C1a_A3.1
NetC1a_A3_2: C1a_A3.2 R1a_A3.1 U2_A3.2 | length 189.4
  Top Layer w10: C1a_A3.2 1700,540.47 R1a_A3.1 1795.24,540.24 1888.28,540.24 U2_A3.2
NetC2a_A0_2: C2a_A0.2 R1a_A0.2 R5a_A0.1 U2_A0.1 | length 484.3
  Top Layer w10: C2a_A0.2 1745.12,2025 1791.06,1979.06 R1a_A0.2 1842.08,1979.06 U2_A0.1@1872.75,1948.39 ; U2_A0.1 1928.39,1948.39 1950,1926.77 1950,1790 1980,1760 R5a_A0.1
NetC2a_A1_2: C2a_A1.2 R1a_A1.2 R5a_A1.1 U2_A1.1 | length 507.9
  Top Layer w10: C2a_A1.2 1746.06,1565 1791.06,1520 1835,1520 1866.18,1488.82 1885.29,1488.82 U2_A1.1 1925.59,1485.59 1945,1466.18 1945,1325 1970,1300 R5a_A1.1
NetC2a_A2_2: C2a_A2.2 R1a_A2.2 R5a_A2.1 U2_A2.1 | length 512.7
  Top Layer w10: C2a_A2.2 1745.59,1105 1791.06,1059.53 R1a_A2.2 1841.61,1059.53 1872.75,1028.39 1931.61,1028.39 1950,1010 1950,865 1980,835 R5a_A2.1
NetC2a_A3_2: C2a_A3.2 R1a_A3.2 R5a_A3.1 U2_A3.1 | length 512.7
  Top Layer w10: C2a_A3.2 1745.59,645 1791.06,599.53 R1a_A3.2 1838.07,599.53 1872.01,565.59 1924.41,565.59 1945,545 1945,395 1970,370 R5a_A3.1
NetC3a_A0_1: C3a_A0.1 C4a_A0.1 R5a_A0.2 R6a_A0.1 | length 515.1
  Top Layer w10: R5a_A0.2 2260,1760 2304.06,1804.06 C3a_A0.1 ; C4a_A0.1 C3a_A0.1 ; R6a_A0.1 2305,1859.06 C3a_A0.1
NetC3a_A0_2: C3a_A0.2 R4a_A0.1 U2_A0.6 | length 209
  Top Layer w10: U2_A0.6 2104.33,1897.2 2141.06,1860.47 R4a_A0.1 C3a_A0.2@2244.53,1860.47
NetC3a_A1_1: C3a_A1.1 C4a_A1.1 R5a_A1.2 R6a_A1.1 | length 510.1
  Top Layer w10: R5a_A1.2 2260,1300 2304.53,1344.53 C3a_A1.1@2304.53,1400 ; C3a_A1.1 C3a_A1.1@2304.53,1400.47 ; C4a_A1.1 C3a_A1.1@2304.53,1400.47 ; R6a_A1.1 C3a_A1.1@2304.53,1400.47
NetC3a_A1_2: C3a_A1.2 R4a_A1.1 U2_A1.6 | length 208.6
  Top Layer w10: U2_A1.6 2107.13,1434.41 2141.06,1400.47 R4a_A1.1 C3a_A1.2@2244.53,1400.47
NetC3a_A2_1: C3a_A2.1 C4a_A2.1 R5a_A2.2 R6a_A2.1 | length 511.7
  Top Layer w10: R5a_A2.2 2255,835 2304.53,884.53 C3a_A2.1 ; C4a_A2.1 C3a_A2.1 ; R6a_A2.1 2305,939.53 C3a_A2.1
NetC3a_A2_2: C3a_A2.2 R4a_A2.1 U2_A2.6 | length 209.5
  Top Layer w10: U2_A2.6 2104.33,977.2 2141.06,940.47 R4a_A2.1 ; R4a_A2.1@2145.47,940 C3a_A2.2
NetC3a_A3_1: C3a_A3.1 C4a_A3.1 R5a_A3.2 R6a_A3.1 | length 515.8
  Top Layer w10: R5a_A3.2 2245,370 2304.53,429.53 C3a_A3.1 ; C4a_A3.1 C3a_A3.1 ; R6a_A3.1 2305,479.53 C3a_A3.1
NetC3a_A3_2: C3a_A3.2 R4a_A3.1 U2_A3.6 | length 209.1
  Top Layer w10: U2_A3.6 2107.13,514.41 2141.06,480.47 R4a_A3.1 C3a_A3.2@2245,480.47
NetCTRL_1: CTRL.1 U3_A0.5 U3_A1.5 U3_A2.5 U3_A3.5 | length 2270
  Top Layer w10: v1@2555.42,1620.42 2555.42,1663.69 2583.58,1691.85 U3_A0.5 ; v1(2560,550) 2560,600 2583.43,623.43 U3_A3.5 ; v1(2560,850) 2560,895 2586.85,921.85 U3_A2.5 ; v1(2560,1300) 2560,1345 2588.43,1373.43 U3_A1.5
  Bottom Layer w10: v1(2560,550) v1(2560,850) 2560,1604.14 2558.83,1605.32 2558.83,1616.17 v1(2555,1620) 2555,1750 2910,2105 CTRL.1
NetCTRL_2: CTRL.2 U3_A0.6 U3_A1.6 U3_A2.6 U3_A3.6 | length 2090.1
  Top Layer w10: v1(2605,1620) 2630.59,1645.59 U3_A0.6 ; v1(2610,550) 2632.2,572.2 U3_A3.6 ; v1(2610,850) 2633.82,873.82 U3_A2.6 ; v1(2610,1300) 2632.2,1322.2 U3_A1.6
  Bottom Layer w10: v1(2610,550) v1(2610,850) 2610,1604.14 2608.83,1605.32 2608.83,1616.17 v1(2605,1620) 2605,1750 2861.57,2006.57 CTRL.2
NetCTRL_3: CTRL.3 U3_A0.7 U3_A1.7 U3_A2.7 U3_A3.7 | length 1962.2
  Top Layer w10: v1(2655,1620) 2656.18,1621.18 U3_A0.7 ; U3_A3.7 2657.8,552.2 v1(2660,550) ; U3_A1.7 2657.8,1302.2 v1(2660,1300) ; v1@2659.41,850.59 U3_A2.7
  Bottom Layer w10: v1(2660,550) v1(2660,850) v1(2660,1300) 2660,1604.14 2658.83,1605.32 2658.83,1616.17 v1(2655,1620) 2655,1750 2813.15,1908.15 CTRL.3
NetRdiv1_1: Rdiv1.1 Rdiv2.2 U4.3 | length 185.1
  Top Layer w20: U4.3@2580.24,316.46 U4.3 Rdiv2.2 Rdiv1.1
NetRfa_A0_1: Rfa_A0.1 U1_A0.3 | length 125.4
  Top Layer w10: Rfa_A0.1 944.53,1930 U1_A0.3
NetRfa_A0_2: Rfa_A0.2 U1_A0.2 | length 125.4
  Top Layer w10: Rfa_A0.2 944.53,1980 U1_A0.2
NetRfa_A1_1: Rfa_A1.1 U1_A1.3 | length 125.4
  Top Layer w10: Rfa_A1.1 944.53,1470 U1_A1.3
NetRfa_A1_2: Rfa_A1.2 U1_A1.2 | length 125.4
  Top Layer w10: Rfa_A1.2 944.53,1520 U1_A1.2
NetRfa_A2_1: Rfa_A2.1 U1_A2.3 | length 125.4
  Top Layer w10: Rfa_A2.1 944.53,1010 U1_A2.3
NetRfa_A2_2: Rfa_A2.2 U1_A2.2 | length 125.4
  Top Layer w10: Rfa_A2.2 944.53,1060 U1_A2.2
NetRfa_A3_1: Rfa_A3.1 U1_A3.3 | length 125.4
  Top Layer w10: Rfa_A3.1 944.53,550 U1_A3.3
NetRfa_A3_2: Rfa_A3.2 U1_A3.2 | length 125.4
  Top Layer w10: Rfa_A3.2 944.53,600 U1_A3.2
NetS0_1: S0.1 U3_A0.1 | length 596.4
  Top Layer w10: U3_A0.1 2880,1795 3057.32,1617.68 S0.1
NetS0_3: S0.3 U3_A1.1 | length 458.1
  Top Layer w10: U3_A1.1 2854.17,1476.57 S0.3
NetS1_1: S1.1 U3_A2.1 | length 407.5
  Top Layer w10: U3_A2.1 2972.32,1025 S1.1
NetS1_3: S1.3 U3_A3.1 | length 388.8
  Top Layer w10: U3_A3.1 2683.39,740.28 2686.26,743.15 S1.3
pads on no net: CTRL.6 CTRL.7 H0.4 H0.5 H0.6 H1.4 H1.5 H1.6 H2.4 H2.5 H2.6 H3.4 H3.5 H3.6 PWR.4 PWR.5 S0.5 S0.6 S1.5 S1.6 U4.5 U4.6 U4.7

## Polygon pours and split planes (outlines as drawn)
3V3/2 on Top Layer "3V3/2_L01_P000" (solid, pour order 0): 2605,360 2705,360 2705,270 2605,270
GND on Bottom Layer "GND_L02_P002" (solid, pour order 2): 90,2435 90,20 3415,20 3415,2435

## Other copper
Top Layer:
  text "Victor Zayakov" at 1650.07,84.43 h100

## Silkscreen, mask and mechanical layers (free items; w line width, h text height)
Top Overlay:
  text "k" at 605,2290 h150
  text "TartanAUV" at 2230,2270 h150
  text "Rev A-Spring 2023" at 1690,2195.04 h80
  text "d" at 1105,-40 h350
  text "A" at 435,-140 h450
Top Solder:
  text "Victor Zayakov" at 1650.07,84.43 h100
Mechanical 3:
  the board outline again, w10